# EAGLE board module_RevB (EAGLE 9.1.1)
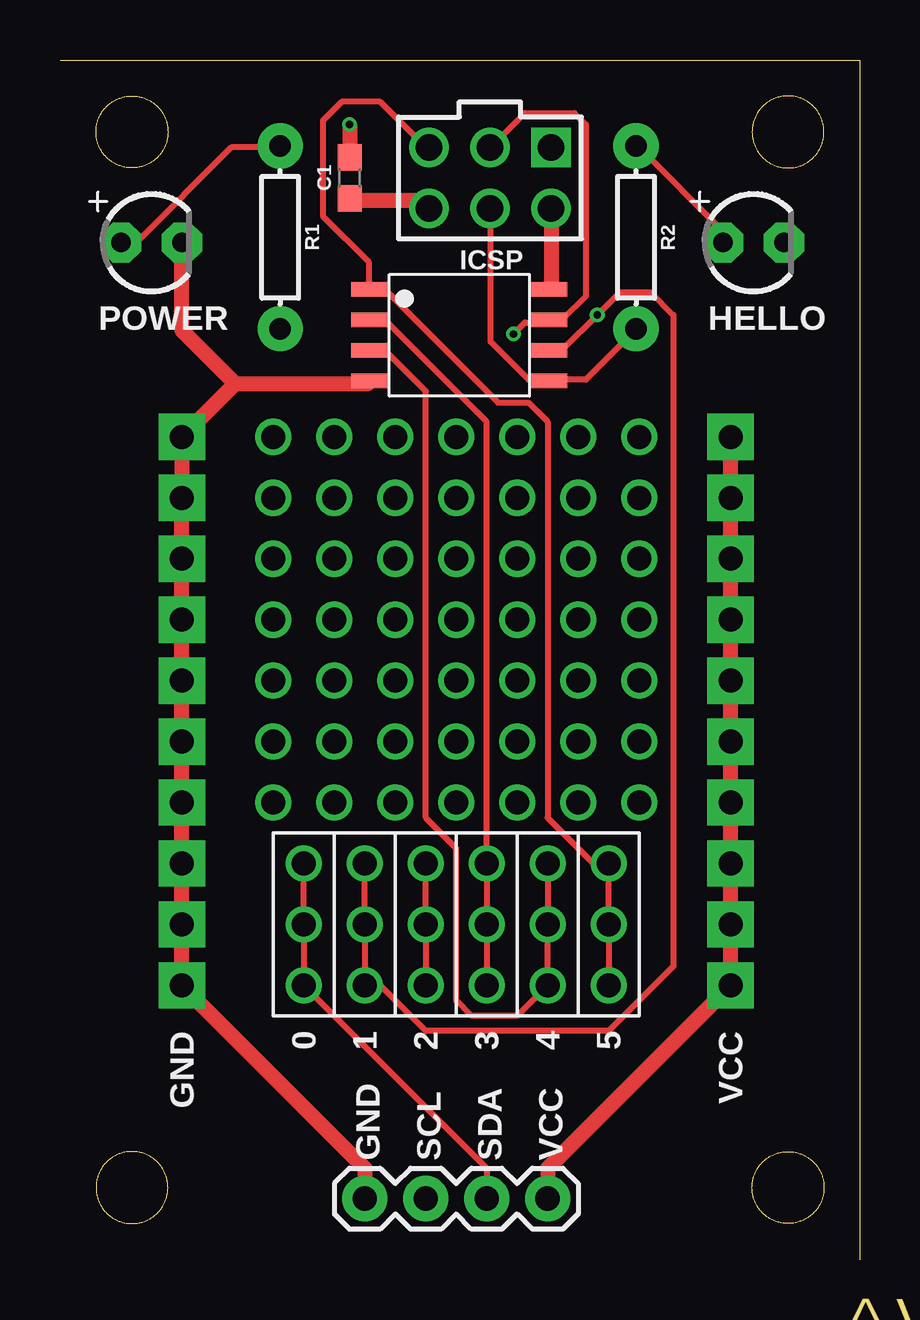
[diagram p0: board, top side]
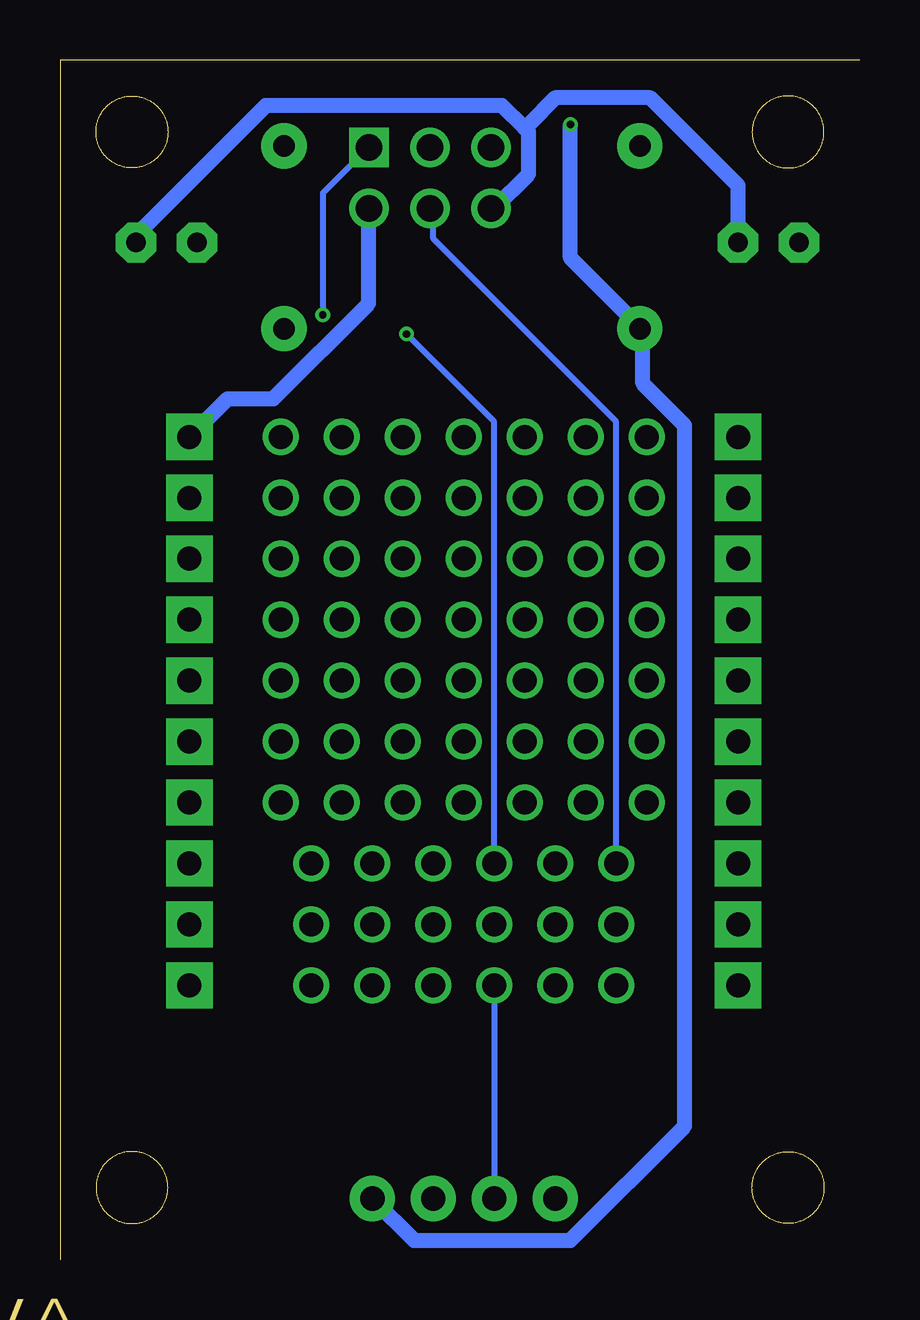
[diagram p1: board, bottom side, seen from below]

Size 33.33 x 50 mm. Coordinates in mm from the lower left corner, seen from the top.
Outline: 33.33,0 33.33,50 0,50
Outline: 4.5,47 4.5,46.95 4.5,46.9 4.49,46.84 4.49,46.79 4.48,46.74 4.47,46.69 4.46,46.64 4.44,46.59 4.43,46.54 4.41,46.49 4.39,46.44 4.37,46.39 4.35,46.35 4.33,46.3 4.3,46.25 4.28,46.21 4.25,46.16 4.22,46.12 4.18,46.08 4.15,46.04 4.12,46 4.08,45.96 4.05,45.93 4.01,45.89 3.97,45.86 3.93,45.82 3.89,45.79 3.85,45.76 3.8,45.73 3.76,45.7 3.71,45.68 3.67,45.66 3.62,45.63 3.57,45.61 3.52,45.59 3.47,45.58 3.42,45.56 3.37,45.55 3.32,45.53 3.27,45.52 3.22,45.52 3.17,45.51 3.12,45.51 3.06,45.5 3.01,45.5 2.96,45.5 2.91,45.5 2.86,45.51 2.81,45.51 2.75,45.52 2.7,45.53 2.65,45.54 2.6,45.55 2.55,45.57 2.5,45.59 2.45,45.6 2.4,45.62 2.36,45.65 2.31,45.67 2.27,45.69 2.22,45.72 2.18,45.75 2.13,45.78 2.09,45.81 2.05,45.84 2.01,45.87 1.97,45.91 1.94,45.94 1.9,45.98 1.86,46.02 1.83,46.06 1.8,46.1 1.77,46.14 1.74,46.19 1.71,46.23 1.69,46.28 1.66,46.32 1.64,46.37 1.62,46.42 1.6,46.47 1.58,46.51 1.56,46.56 1.55,46.61 1.54,46.66 1.53,46.72 1.52,46.77 1.51,46.82 1.51,46.87 1.5,46.92 1.5,46.97 1.5,47.03 1.5,47.08 1.51,47.13 1.51,47.18 1.52,47.23 1.53,47.28 1.54,47.34 1.55,47.39 1.56,47.44 1.58,47.49 1.6,47.53 1.62,47.58 1.64,47.63 1.66,47.68 1.69,47.72 1.71,47.77 1.74,47.81 1.77,47.86 1.8,47.9 1.83,47.94 1.86,47.98 1.9,48.02 1.94,48.06 1.97,48.09 2.01,48.13 2.05,48.16 2.09,48.19 2.13,48.22 2.18,48.25 2.22,48.28 2.27,48.31 2.31,48.33 2.36,48.35 2.4,48.38 2.45,48.4 2.5,48.41 2.55,48.43 2.6,48.45 2.65,48.46 2.7,48.47 2.75,48.48 2.81,48.49 2.86,48.49 2.91,48.5 2.96,48.5 3.01,48.5 3.06,48.5 3.12,48.49 3.17,48.49 3.22,48.48 3.27,48.48 3.32,48.47 3.37,48.45 3.42,48.44 3.47,48.42 3.52,48.41 3.57,48.39 3.62,48.37 3.67,48.34 3.71,48.32 3.76,48.3 3.8,48.27 3.85,48.24 3.89,48.21 3.93,48.18 3.97,48.14 4.01,48.11 4.05,48.07 4.08,48.04 4.12,48 4.15,47.96 4.18,47.92 4.22,47.88 4.25,47.84 4.28,47.79 4.3,47.75 4.33,47.7 4.35,47.65 4.37,47.61 4.39,47.56 4.41,47.51 4.43,47.46 4.44,47.41 4.46,47.36 4.47,47.31 4.48,47.26 4.49,47.21 4.49,47.16 4.5,47.1 4.5,47.05 4.5,47
Outline: 28.83,47 28.83,46.95 28.84,46.9 28.84,46.84 28.85,46.79 28.86,46.74 28.87,46.69 28.88,46.64 28.89,46.59 28.91,46.54 28.92,46.49 28.94,46.44 28.96,46.39 28.98,46.35 29.01,46.3 29.03,46.25 29.06,46.21 29.09,46.16 29.12,46.12 29.15,46.08 29.18,46.04 29.21,46 29.25,45.96 29.29,45.93 29.32,45.89 29.36,45.86 29.4,45.82 29.45,45.79 29.49,45.76 29.53,45.73 29.58,45.7 29.62,45.68 29.67,45.66 29.71,45.63 29.76,45.61 29.81,45.59 29.86,45.58 29.91,45.56 29.96,45.55 30.01,45.53 30.06,45.52 30.11,45.52 30.16,45.51 30.22,45.51 30.27,45.5 30.32,45.5 30.37,45.5 30.42,45.5 30.48,45.51 30.53,45.51 30.58,45.52 30.63,45.53 30.68,45.54 30.73,45.55 30.78,45.57 30.83,45.59 30.88,45.6 30.93,45.62 30.98,45.65 31.02,45.67 31.07,45.69 31.11,45.72 31.16,45.75 31.2,45.78 31.24,45.81 31.28,45.84 31.32,45.87 31.36,45.91 31.4,45.94 31.43,45.98 31.47,46.02 31.5,46.06 31.54,46.1 31.57,46.14 31.59,46.19 31.62,46.23 31.65,46.28 31.67,46.32 31.69,46.37 31.71,46.42 31.73,46.47 31.75,46.51 31.77,46.56 31.78,46.61 31.8,46.66 31.81,46.72 31.82,46.77 31.82,46.82 31.83,46.87 31.83,46.92 31.83,46.97 31.83,47.03 31.83,47.08 31.83,47.13 31.82,47.18 31.82,47.23 31.81,47.28 31.8,47.34 31.78,47.39 31.77,47.44 31.75,47.49 31.73,47.53 31.71,47.58 31.69,47.63 31.67,47.68 31.65,47.72 31.62,47.77 31.59,47.81 31.57,47.86 31.54,47.9 31.5,47.94 31.47,47.98 31.43,48.02 31.4,48.06 31.36,48.09 31.32,48.13 31.28,48.16 31.24,48.19 31.2,48.22 31.16,48.25 31.11,48.28 31.07,48.31 31.02,48.33 30.98,48.35 30.93,48.38 30.88,48.4 30.83,48.41 30.78,48.43 30.73,48.45 30.68,48.46 30.63,48.47 30.58,48.48 30.53,48.49 30.48,48.49 30.42,48.5 30.37,48.5 30.32,48.5 30.27,48.5 30.22,48.49 30.16,48.49 30.11,48.48 30.06,48.48 30.01,48.47 29.96,48.45 29.91,48.44 29.86,48.42 29.81,48.41 29.76,48.39 29.71,48.37 29.67,48.34 29.62,48.32 29.58,48.3 29.53,48.27 29.49,48.24 29.45,48.21 29.4,48.18 29.36,48.14 29.32,48.11 29.29,48.07 29.25,48.04 29.21,48 29.18,47.96 29.15,47.92 29.12,47.88 29.09,47.84 29.06,47.79 29.03,47.75 29.01,47.7 28.98,47.65 28.96,47.61 28.94,47.56 28.92,47.51 28.91,47.46 28.89,47.41 28.88,47.36 28.87,47.31 28.86,47.26 28.85,47.21 28.84,47.16 28.84,47.1 28.83,47.05 28.83,47
Outline: 28.83,3 28.83,3.05 28.84,3.1 28.84,3.16 28.85,3.21 28.86,3.26 28.87,3.31 28.88,3.36 28.89,3.41 28.91,3.46 28.92,3.51 28.94,3.56 28.96,3.61 28.98,3.65 29.01,3.7 29.03,3.75 29.06,3.79 29.09,3.83 29.12,3.88 29.15,3.92 29.18,3.96 29.21,4 29.25,4.04 29.29,4.07 29.32,4.11 29.36,4.14 29.4,4.18 29.45,4.21 29.49,4.24 29.53,4.27 29.58,4.29 29.62,4.32 29.67,4.34 29.71,4.37 29.76,4.39 29.81,4.41 29.86,4.42 29.91,4.44 29.96,4.45 30.01,4.46 30.06,4.47 30.11,4.48 30.16,4.49 30.22,4.5 30.27,4.5 30.32,4.5 30.37,4.5 30.42,4.5 30.48,4.49 30.53,4.49 30.58,4.48 30.63,4.47 30.68,4.46 30.73,4.45 30.78,4.43 30.83,4.42 30.88,4.4 30.93,4.38 30.98,4.36 31.02,4.33 31.07,4.31 31.11,4.28 31.16,4.25 31.2,4.22 31.24,4.19 31.28,4.16 31.32,4.13 31.36,4.09 31.4,4.06 31.43,4.02 31.47,3.98 31.5,3.94 31.54,3.9 31.57,3.86 31.59,3.81 31.62,3.77 31.65,3.72 31.67,3.68 31.69,3.63 31.71,3.58 31.73,3.54 31.75,3.49 31.77,3.44 31.78,3.39 31.8,3.34 31.81,3.29 31.82,3.23 31.82,3.18 31.83,3.13 31.83,3.08 31.83,3.03 31.83,2.97 31.83,2.92 31.83,2.87 31.82,2.82 31.82,2.77 31.81,2.71 31.8,2.66 31.78,2.61 31.77,2.56 31.75,2.51 31.73,2.46 31.71,2.42 31.69,2.37 31.67,2.32 31.65,2.28 31.62,2.23 31.59,2.19 31.57,2.14 31.54,2.1 31.5,2.06 31.47,2.02 31.43,1.98 31.4,1.94 31.36,1.91 31.32,1.87 31.28,1.84 31.24,1.81 31.2,1.78 31.16,1.75 31.11,1.72 31.07,1.69 31.02,1.67 30.98,1.65 30.93,1.62 30.88,1.6 30.83,1.58 30.78,1.57 30.73,1.55 30.68,1.54 30.63,1.53 30.58,1.52 30.53,1.51 30.48,1.51 30.42,1.5 30.37,1.5 30.32,1.5 30.27,1.5 30.22,1.5 30.16,1.51 30.11,1.52 30.06,1.52 30.01,1.53 29.96,1.55 29.91,1.56 29.86,1.58 29.81,1.59 29.76,1.61 29.71,1.63 29.67,1.66 29.62,1.68 29.58,1.71 29.53,1.73 29.49,1.76 29.45,1.79 29.4,1.82 29.36,1.86 29.32,1.89 29.29,1.93 29.25,1.96 29.21,2 29.18,2.04 29.15,2.08 29.12,2.12 29.09,2.17 29.06,2.21 29.03,2.25 29.01,2.3 28.98,2.35 28.96,2.39 28.94,2.44 28.92,2.49 28.91,2.54 28.89,2.59 28.88,2.64 28.87,2.69 28.86,2.74 28.85,2.79 28.84,2.84 28.84,2.9 28.83,2.95 28.83,3
Outline: 4.5,3 4.5,3.05 4.5,3.1 4.49,3.16 4.49,3.21 4.48,3.26 4.47,3.31 4.46,3.36 4.44,3.41 4.43,3.46 4.41,3.51 4.39,3.56 4.37,3.61 4.35,3.65 4.33,3.7 4.3,3.75 4.28,3.79 4.25,3.83 4.22,3.88 4.18,3.92 4.15,3.96 4.12,4 4.08,4.04 4.05,4.07 4.01,4.11 3.97,4.14 3.93,4.18 3.89,4.21 3.85,4.24 3.8,4.27 3.76,4.29 3.71,4.32 3.67,4.34 3.62,4.37 3.57,4.39 3.52,4.41 3.47,4.42 3.42,4.44 3.37,4.45 3.32,4.46 3.27,4.47 3.22,4.48 3.17,4.49 3.12,4.5 3.06,4.5 3.01,4.5 2.96,4.5 2.91,4.5 2.86,4.49 2.81,4.49 2.75,4.48 2.7,4.47 2.65,4.46 2.6,4.45 2.55,4.43 2.5,4.42 2.45,4.4 2.4,4.38 2.36,4.36 2.31,4.33 2.27,4.31 2.22,4.28 2.18,4.25 2.13,4.22 2.09,4.19 2.05,4.16 2.01,4.13 1.97,4.09 1.94,4.06 1.9,4.02 1.86,3.98 1.83,3.94 1.8,3.9 1.77,3.86 1.74,3.81 1.71,3.77 1.69,3.72 1.66,3.68 1.64,3.63 1.62,3.58 1.6,3.54 1.58,3.49 1.56,3.44 1.55,3.39 1.54,3.34 1.53,3.29 1.52,3.23 1.51,3.18 1.51,3.13 1.5,3.08 1.5,3.03 1.5,2.97 1.5,2.92 1.51,2.87 1.51,2.82 1.52,2.77 1.53,2.71 1.54,2.66 1.55,2.61 1.56,2.56 1.58,2.51 1.6,2.46 1.62,2.42 1.64,2.37 1.66,2.32 1.69,2.28 1.71,2.23 1.74,2.19 1.77,2.14 1.8,2.1 1.83,2.06 1.86,2.02 1.9,1.98 1.94,1.94 1.97,1.91 2.01,1.87 2.05,1.84 2.09,1.81 2.13,1.78 2.18,1.75 2.22,1.72 2.27,1.69 2.31,1.67 2.36,1.65 2.4,1.62 2.45,1.6 2.5,1.58 2.55,1.57 2.6,1.55 2.65,1.54 2.7,1.53 2.75,1.52 2.81,1.51 2.86,1.51 2.91,1.5 2.96,1.5 3.01,1.5 3.06,1.5 3.12,1.5 3.17,1.51 3.22,1.52 3.27,1.52 3.32,1.53 3.37,1.55 3.42,1.56 3.47,1.58 3.52,1.59 3.57,1.61 3.62,1.63 3.67,1.66 3.71,1.68 3.76,1.71 3.8,1.73 3.85,1.76 3.89,1.79 3.93,1.82 3.97,1.86 4.01,1.89 4.05,1.93 4.08,1.96 4.12,2 4.15,2.04 4.18,2.08 4.22,2.12 4.25,2.17 4.28,2.21 4.3,2.25 4.33,2.3 4.35,2.35 4.37,2.39 4.39,2.44 4.41,2.49 4.43,2.54 4.44,2.59 4.46,2.64 4.47,2.69 4.48,2.74 4.49,2.79 4.49,2.84 4.5,2.9 4.5,2.95 4.5,3
Copper layers (1*16): Top 0.035mm / dielectric 1.5mm / Bottom 0.035mm
Design rules "SeeedStudio_2layer_DRU_no_angle_20140221 *": minimum track width 6mil, minimum drill 12mil, track to track 6mil, track to pad 6mil, pad to pad 6mil, via to via 6mil, smd to smd 0mil, copper to edge 10mil, drill to drill 10mil, minimum pad ring 10mil, minimum via ring 6mil, stop-mask expansion 2mil, vias tented up to drill 100mil, thermal gap 10mil
Net classes: 0 default: width 0.254 mm, clearance 0.381 mm; 1 VCC: width 0.635 mm, clearance 0.381 mm; 2 GND: width 0.635 mm, clearance 0.381 mm

## Footprints (pad centres in the part's own frame; a part is rotated, then mirrored left to right if it is on the bottom)
3X-PADS = drill 1: P$1 0,0; P$2 0,-2.54; P$3 0,-5.08
0603 = smd 1.1 x 1: 1 -0.85,0; 2 0.85,0
10X-PADS = drill 1 pad 1.93 square: P$1 0,0; P$2 0,-2.54; P$3 0,-5.08; P$4 0,-7.62; P$5 0,-10.16; P$6 0,-12.7; P$7 0,-15.24; P$8 0,-17.78; P$9 0,-20.32; P$10 0,-22.86
LED3MM = drill 0.813 pad 1.676 octagon: NEG 1.27,0; POS -1.27,0
SOT127P798X216-8N = smd 1.5 x 0.6: GND -3.75,-1.905; PB0 3.75,-1.905; PB1 3.75,-0.635; PB2 3.75,0.635; PB3 -3.75,0.635; PB4 -3.75,-0.635; PB5 -3.75,1.905; VCC 3.75,1.905
HDRV6W64P254_2X3_762X508X868P = drill 1.1 pad 1.65: 0/MOSI/SDA 0,1.27; 2/SCK/SCL 0,3.81; 5/RST -2.54,3.81; GND -2.54,1.27; VCC 2.54,1.27 | drill 1.1 pad 1.65 square: 1/RST 2.54,3.81
1X04 = drill 1.016 pad 1.88: 1 0,0; 2 2.54,0; 3 5.08,0; 4 7.62,0
AXIAL-0.3 = drill 0.9 pad 1.88: P$1 -3.81,0; P$2 3.81,0
7X-PADS-NC = drill 1: P$1 0,5.08; P$2 0,2.54; P$3 0,0; P$4 0,12.7; P$5 0,10.16; P$6 0,7.62; P$7 0,15.24; P$8 2.54,15.24; P$9 2.54,12.7; P$10 2.54,10.16; P$11 2.54,7.62; P$12 2.54,5.08; P$13 2.54,2.54; P$14 2.54,0; P$15 5.08,5.08; P$16 5.08,2.54; P$17 5.08,0; P$18 5.08,12.7; P$19 5.08,10.16; P$20 5.08,7.62; P$21 5.08,15.24; P$22 7.62,15.24; P$23 7.62,12.7; P$24 7.62,10.16; P$25 7.62,7.62; P$26 7.62,5.08; P$27 7.62,2.54; P$28 7.62,0; P$29 10.16,5.08; P$30 10.16,2.54; P$31 10.16,0; P$32 10.16,12.7; P$33 10.16,10.16; P$34 10.16,7.62; P$35 10.16,15.24; P$36 12.7,15.24; P$37 12.7,12.7; P$38 12.7,10.16; P$39 12.7,7.62; P$40 12.7,5.08; P$41 12.7,2.54; P$42 12.7,0; P$43 15.24,15.24; P$44 15.24,12.7; P$45 15.24,10.16; P$46 15.24,7.62; P$47 15.24,5.08; P$48 15.24,2.54; P$49 15.24,0

## Placement (x,y rotation side)
0  3X-PADS-CONNECTED  [3X-PADS]  10.16,16.51 0 top
1  3X-PADS-CONNECTED  [3X-PADS]  12.7,16.51 0 top
2  3X-PADS-CONNECTED  [3X-PADS]  15.24,16.51 0 top
3  3X-PADS-CONNECTED  [3X-PADS]  17.78,16.51 0 top
4  3X-PADS-CONNECTED  [3X-PADS]  20.32,16.51 0 top
5  3X-PADS-CONNECTED  [3X-PADS]  22.86,16.51 0 top
C1  0.1uF  [0603]  12.06,45.09 90 top
GND  10X-PADS  [10X-PADS]  5.08,34.29 0 top
HELLO  LED3MM  [LED3MM]  28.89,42.39 0 top
IC1  ATTINY85-20SU  [SOT127P798X216-8N]  16.64,38.53 0 top
J1  M20-9980346  [HDRV6W64P254_2X3_762X508X868P]  17.91,42.55 0 top
J2  [1X04]  12.7,2.54 0 top
POWER  LED3MM  [LED3MM]  3.81,42.39 0 top
R1  220  [AXIAL-0.3]  9.17,42.61 270 top
R2  220  [AXIAL-0.3]  24,42.61 270 top
U$2  7X-PADS-NC  [7X-PADS-NC]  8.89,19.05 0 top
VCC  10X-PADS  [10X-PADS]  27.94,34.29 0 top

## Library data of the parts
0 1-5 GND HELLO POWER U$2 VCC = BadgeParts
C1 = SparkFun-Capacitors; PROD_ID: CAP-08604
IC1 = BadgeParts; ARROW_PART_NUMBER: ATTINY85-20SU; ARROW_PRICE/STOCK: https://www.arrow.com/en/products/attiny85-20su/microchip-technology; DESCRIPTION: MICROCHIP - ATTINY85-20SU - MICROCONTROLLER MCU, 8 BIT, ATTINY, 20MHZ, SOIC-8; HEIGHT: 2.16mm; MANUFACTURER_NAME: Microchip; MANUFACTURER_PART_NUMBER: ATTINY85-20SU; RS_PART_NUMBER: 1331674; RS_PRICE/STOCK: http://uk.rs-online.com/web/p/products/1331674
J1 = BadgeParts; ARROW_PART_NUMBER: M20-9980346; ARROW_PRICE/STOCK: http://uk.rs-online.com/web/p/products/7457046P; DESCRIPTION: 03+03 DIL Vertical Pin Header HARWIN M20 Series, 2.54mm Pitch 6 Way 2 Row Straight PCB Header, Solder Termination, 3A; HEIGHT: 8.68mm; MANUFACTURER_NAME: HARWIN; MANUFACTURER_PART_NUMBER: M20-9980346; RS_PART_NUMBER: 7457046P; RS_PRICE/STOCK: http://uk.rs-online.com/web/p/products/7457046P
J2 = SparkFun-Connectors; PROD_ID: CONN-09696
R1 R2 = SparkFun-Resistors

## Nets
GND [GND]: C1.1 GND.P$1 GND.P$2 GND.P$3 GND.P$4 GND.P$5 GND.P$6 GND.P$7 GND.P$8 GND.P$9 GND.P$10 HELLO.NEG IC1.GND J1.GND J2.1 POWER.NEG
N$1: POWER.POS R1.P$1
N$3: HELLO.POS R2.P$1
PB0: 0.P$1 0.P$2 0.P$3 IC1.PB0 J1.0/MOSI/SDA J2.3 R2.P$2
PB1: 1.P$1 1.P$2 1.P$3 IC1.PB1 J1.1/RST
PB2: 2.P$1 2.P$2 2.P$3 IC1.PB2 J1.2/SCK/SCL J2.2
PB3: 3.P$1 3.P$2 3.P$3 IC1.PB3
PB4: 4.P$1 4.P$2 4.P$3 IC1.PB4
PB5: 5.P$1 5.P$2 5.P$3 IC1.PB5 J1.5/RST
VCC [VCC]: C1.2 IC1.VCC J1.VCC J2.4 R1.P$2 VCC.P$1 VCC.P$2 VCC.P$3 VCC.P$4 VCC.P$5 VCC.P$6 VCC.P$7 VCC.P$8 VCC.P$9 VCC.P$10

## Tracks (layer width: path | path; a pad name or v marks a point on that pad's centre or on a via)
GND
  Top 0.635: C1.1 12.06,44.13 14.92,44.13 15.24,43.81 J1.GND | 7.3,36.51 12.86,36.51 IC1.GND | 7.3,36.51 GND.P$1 5.08,34.13 GND.P$2 5.08,31.59 5.08,29.37 GND.P$3 5.08,26.83 GND.P$4 5.08,24.29 GND.P$5 5.08,21.75 GND.P$6 5.08,19.21 GND.P$7 5.08,16.67 GND.P$8 5.08,14.13 GND.P$9 5.08,11.59 GND.P$10 12.7,3.81 J2.1 | POWER.NEG 5.08,38.73 7.14,36.67 7.3,36.51
  Bottom 0.635: HELLO.NEG 30.16,42.7 24.77,48.1 14.92,48.1 13.97,47.15 | 13.97,47.15 13.81,46.99 13.81,45.24 15.24,43.81 J1.GND | POWER.NEG 5.08,44.77 8.73,48.42 12.7,48.42 13.81,47.31 13.97,47.15
N$1
  Top 0.254: POWER.POS 3.17,42.39 7.14,46.35 9.05,46.35 R1.P$1
N$3
  Top 0.254: HELLO.POS 27.62,42.86 24.13,46.35 R2.P$1
PB0
  Top 0.254: R2.P$2 23.97,38.73 21.91,36.67 20.48,36.67 IC1.PB0 20.32,36.67 19.53,36.67 17.94,38.26 17.94,43.81 J1.0/MOSI/SDA | 0.P$1 0.P$2 0.P$3 17.78,3.81 J2.3
  Bottom 0.254: 0.P$1 10.16,34.92 17.78,42.55 17.78,43.81 J1.0/MOSI/SDA
PB1  (via drill 0.3)
  Top 0.254: 1.P$1 1.P$2 1.P$3 13.34,11.43 15.24,9.53 22.86,9.53 25.56,12.22 25.56,39.37 24.61,40.32 23.34,40.32 v22.38,39.37 20.95,37.94 20.48,37.94 IC1.PB1
  Bottom 0.254: v22.38,39.37 22.38,44.45 20.48,46.35 J1.1/RST
PB2  (via drill 0.3)
  Top 0.254: J1.2/SCK/SCL 17.94,46.35 19.37,47.78 21.43,47.78 21.91,47.31 21.91,40.16 20.95,39.21 20.48,39.21 IC1.PB2 20.32,39.05 19.37,39.05 v18.89,38.58 | 2.P$3 2.P$2 2.P$1
  Bottom 0.254: 2.P$3 J2.2 | v18.89,38.58 15.24,34.92 2.P$1
PB3
  Top 0.254: 3.P$3 3.P$2 3.P$1 17.78,34.92 13.65,39.05 13.02,39.05 IC1.PB3
PB4
  Top 0.254: 4.P$1 4.P$2 4.P$3 19.05,10.16 17.14,10.16 16.51,10.79 16.51,17.14 15.24,18.41 15.24,36.2 13.65,37.78 13.02,37.78 IC1.PB4
PB5
  Top 0.254: 5.P$3 5.P$2 5.P$1 22.23,16.51 20.32,18.41 20.32,34.92 19.53,35.72 18.26,35.72 13.65,40.32 13.02,40.32 IC1.PB5 12.86,40.48 12.86,41.59 10.95,43.5 10.95,47.47 11.75,48.26 13.34,48.26 15.24,46.35 J1.5/RST
VCC  (via drill 0.3)
  Top 0.635: v12.06,47.31 12.06,46.04 C1.2 | IC1.VCC 20.48,40.48 20.48,43.81 J1.VCC | J2.4 20.32,3.81 VCC.P$10 27.94,11.59 VCC.P$9 27.94,14.13 VCC.P$8 27.94,16.67 VCC.P$7 27.94,19.21 VCC.P$6 27.94,21.75 VCC.P$5 27.94,24.29 VCC.P$4 27.94,26.83 VCC.P$3 27.94,29.37 VCC.P$2 27.94,31.91 VCC.P$1
  Bottom 0.635: v12.06,47.31 12.06,41.75 9.21,38.89 R1.P$2 9.05,38.58 9.05,36.51 7.3,34.77 7.3,5.56 12.06,0.79 18.57,0.79 J2.4 | VCC.P$1 26.35,35.88 24.45,35.88 20.48,39.85 20.48,43.81 J1.VCC

## Text on the board
Dimension: ^ V-Groove
tPlace: POWER | HELLO | GND | SCL | SDA | VCC